# Altium PCB Geiger.PcbDoc
Units mil, origin at the board's own origin, x right, y up, seen from the top; angles counter-clockwise.
Board outline 2005 x 2005 mil, 2 copper layers (Top Layer, Bottom Layer); 26 components, 16 nets, 62 pads, 10 vias.
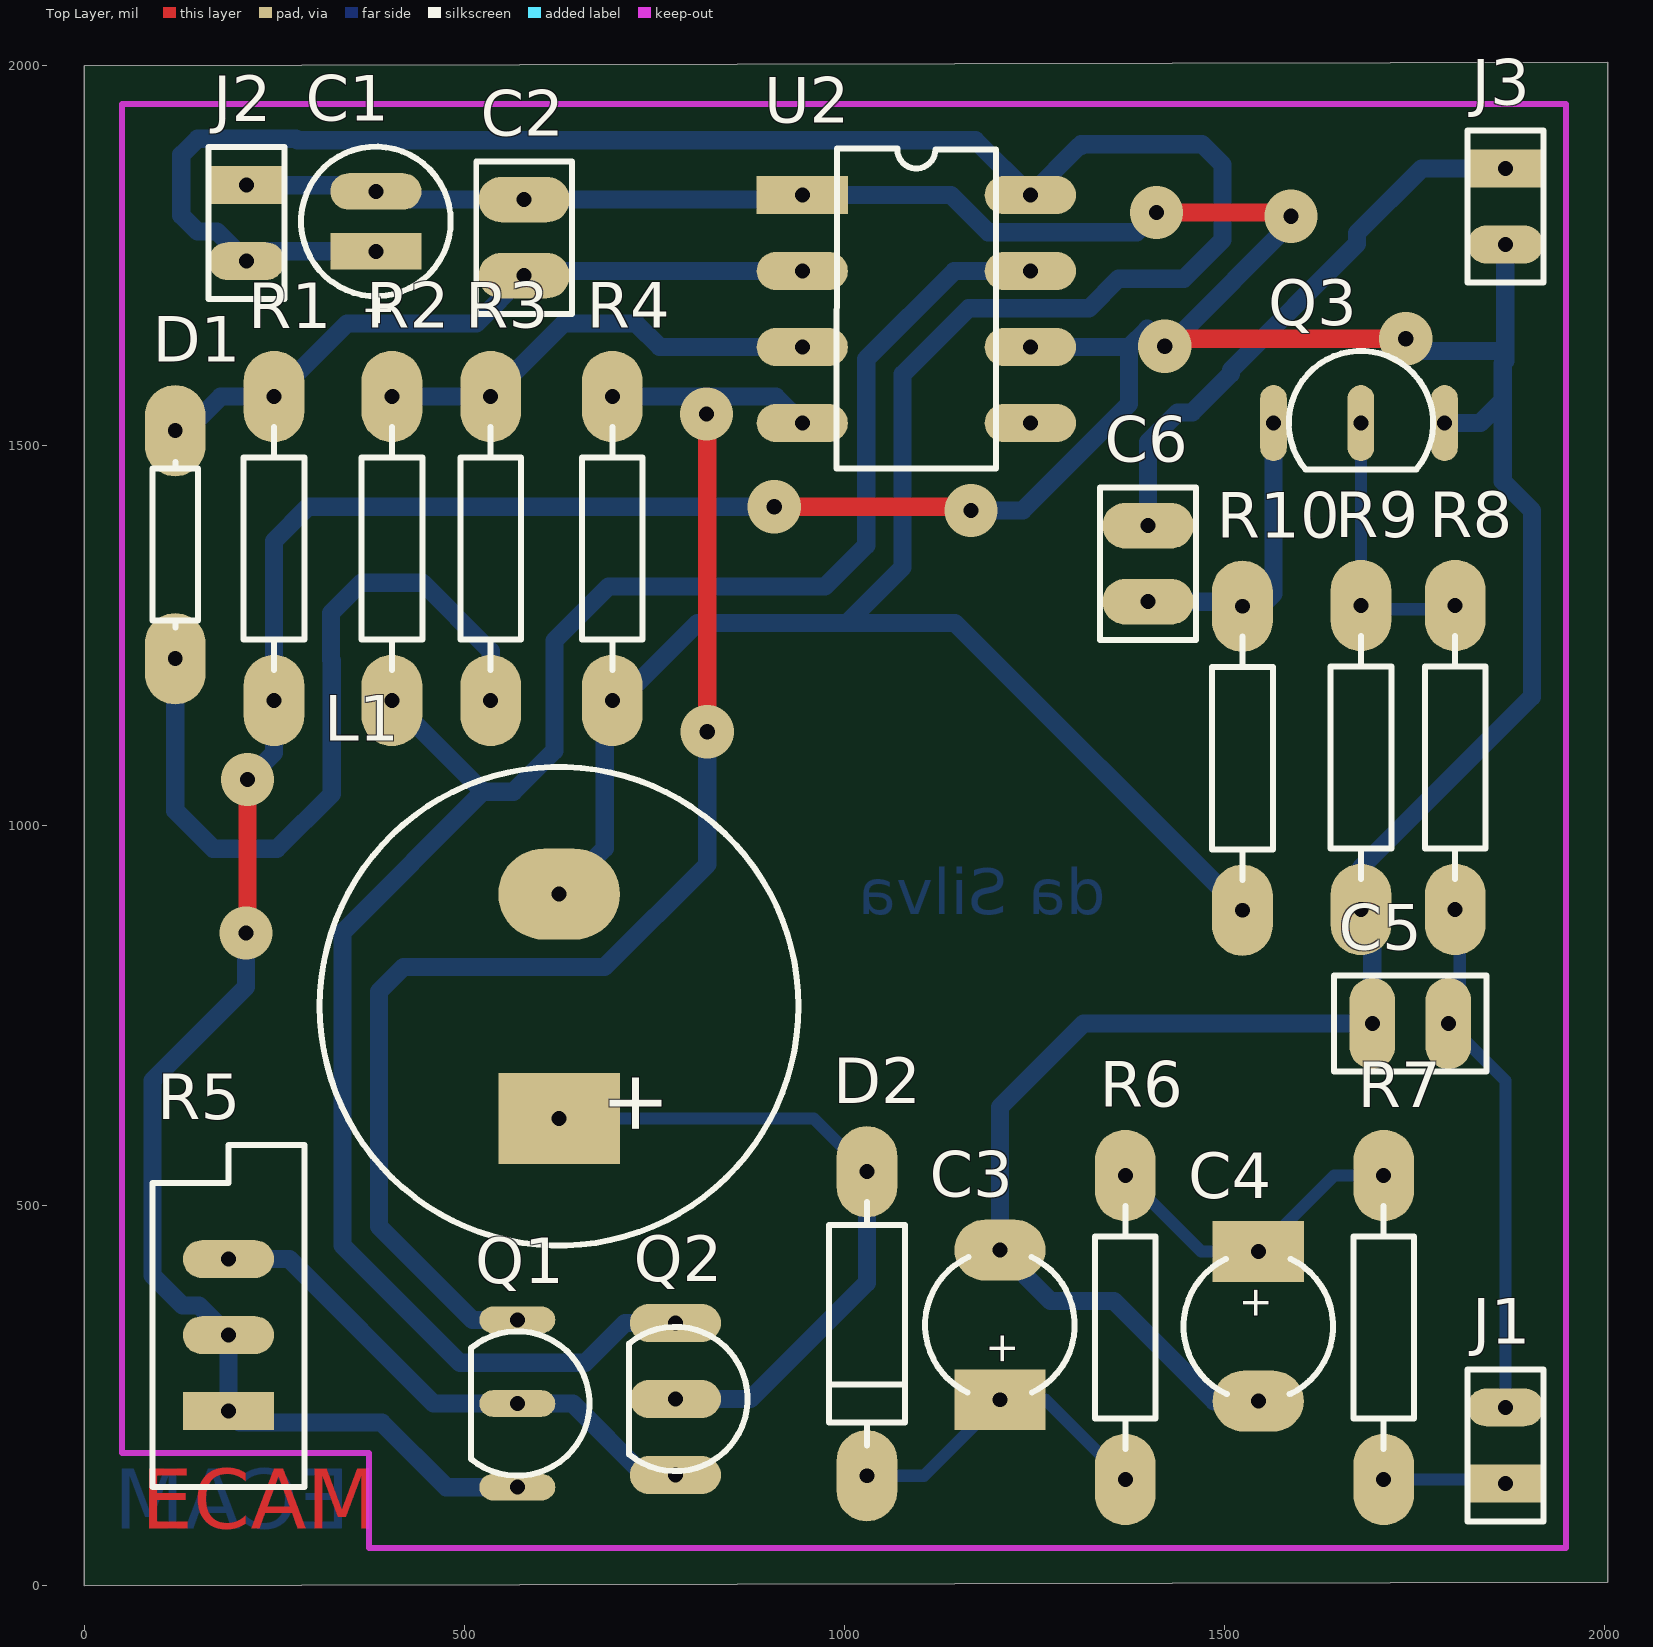
[diagram p0: Top Layer view]
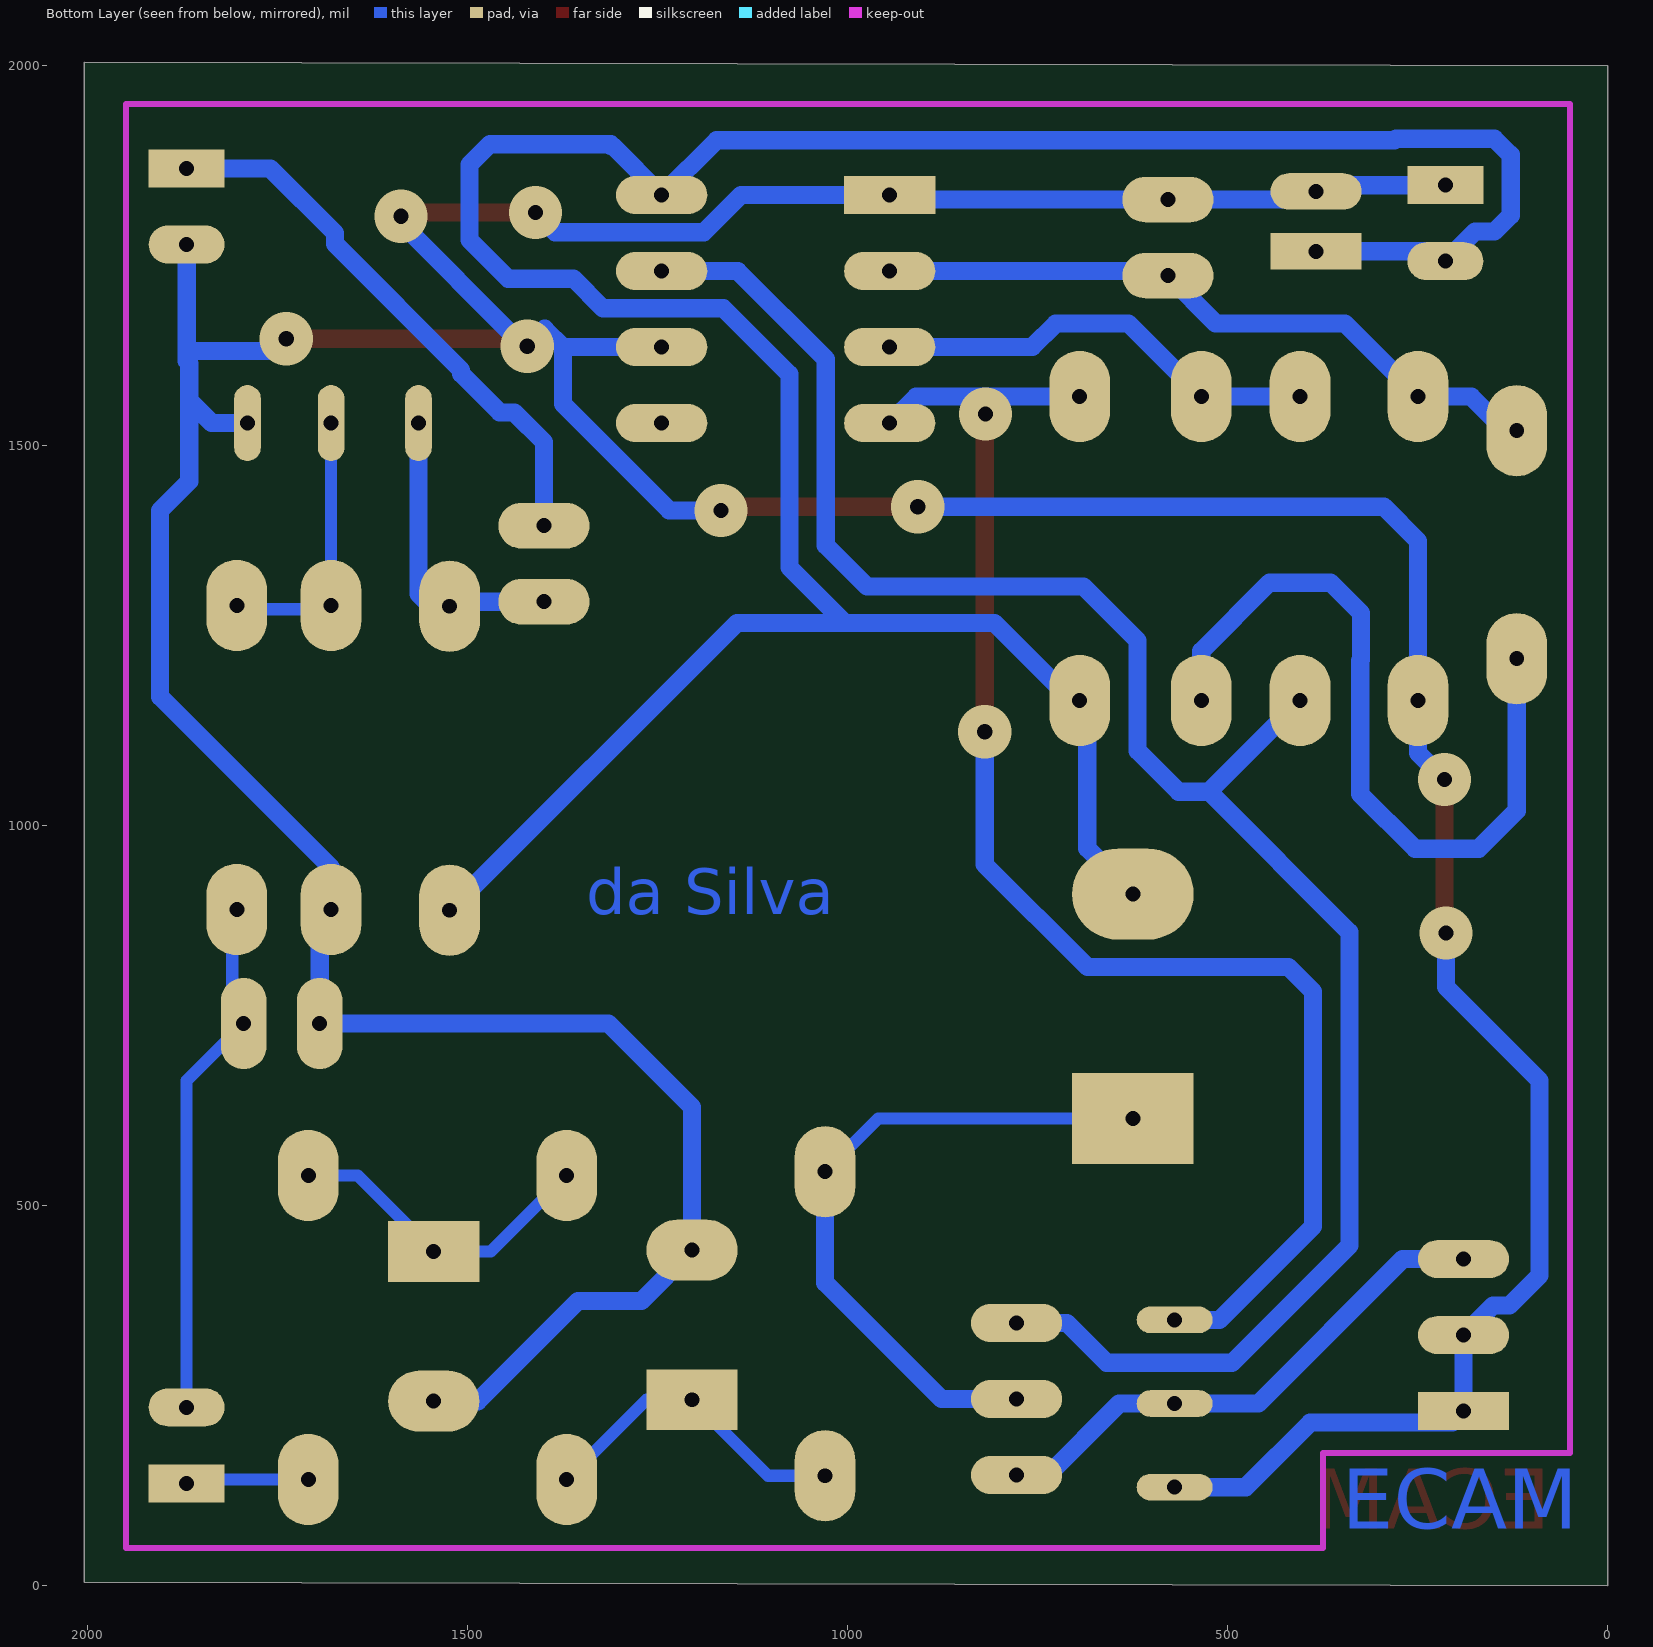
[diagram p1: Bottom Layer view, seen from below]

## Layer stack, top to bottom
Top Layer: signal copper 1.4
Dielectric: core 12.6, FR-4, Dk 4.8
Bottom Layer: signal copper 1.4

## Board outline
0,0 0,2000 2005,2005 2005,5

## Design rules (kind name [scope] priority, off if disabled: settings)
Clearance "Clearance T DIP" [(IsTrack) vs (IsPad AND( HasFootprint('DIP*')))] p1: gap=12
Clearance "Clearance PT" [(isTrack) vs (isPad)] p2: gap=24
Clearance "Clearance TT" [(isTrack) vs (isTrack)] p3: gap=24
Clearance "Clearance PP" [(IsPad) vs (IsPad)] p4: gap=24
Clearance [All] p5: gap=40
FabricationTestPointUsage TestPointUsage [All] p1: valid=0 allowmultiple=FALSE
FabricationTestpoint Testpoint [All] p1: side=3 testpointundercomponent=TRUE minsize=40 maxsize=100 preferedsize=60 minholesize=0 maxholesize=40 preferedholesize=32 testpointgrid=1 allowsidetop=TRUE allowsidebottom=TRUE usegrid=TRUE gridtolerance=0.01
HoleSize [All] p1: absolutevalues=TRUE maxlimit=21.65 minlimit=17.72 maxpercent=80.000 minpercent=20.000
PolygonConnect [All] p1: connectstyle=Relief reliefconductorwidth=10 reliefentries=4 polygonreliefangle="90 Angle" airgapwidth=10
RoutingCorners [All] p1: cornerstyle=45-Degree minsetback=100 maxsetback=1000
RoutingLayers [All] p1: top layer_v5=FALSE bottom layer_v5=TRUE
RoutingVias "ECAM Vias" [All] p1: holewidth=19.68 width=80 viastyle="Through Hole" minholewidth=17.72 minwidth=60 maxholewidth=21.65 maxwidth=120
SolderMaskExpansion [All] p1: expansion=4
Width Width_GND [InNet('GND')] p1: maxlimit=1000 minlimit=24 preferedwidth=40
Width Width_VCC [InNet('VCC')] p2: maxlimit=1000 minlimit=24 preferedwidth=40
Width [All] p3: maxlimit=1000 minlimit=16 preferedwidth=24
23 further rules are at their usual default settings.

## Components (designator, comment, footprint, x,y, rotation, side; value= is the part's Value field where it differs from the comment)
C1 "Cond pol axial" CAPPR2-5x6.8 384,1756 r90 top
C2 "Condensateur" CAPR2.54-5.1x3.2 579,1824 r270 top
C3 "Condensateur" CAPPR5-5x5 1205,245 r90 top
C4 "Condensateur" CAPPR5-5x5 1545,440 r270 top
C5 "Condensateur" CAPR2.54-5.1x3.2 1795,740 r180 top
C6 "Condensateur" CAPR2.54-5.1x3.2 1400,1295 r90 top
D1 "Diode" AXIAL-0.3 120,1220 r90 top
D2 "Diode" DIODE-0.4 1030,545 r270 top
J1 "Connecteur 2" HDR1X2 1870,135 r90 top
J2 "Connecteur 2" HDR1X2 214,1843 r270 top
J3 "Connecteur 2" HDR1X2 1870,1865 r270 top
L1 "Inductance" CAPPR7.5-16x35 625,615 r90 top
Q1 "NPN" TO-92#1 570,190 r180 top
Q2 "NPN" "TO-92 - Bis" 778,146 r180 top
Q3 "NPN" TO-92#2 1730,1530 r270 top
R1 "Résistance" AXIAL-0.4 250,1165 r90 top
R2 "Résistance" AXIAL-0.4 405,1165 r90 top
R3 "Résistance" AXIAL-0.4 535,1165 r90 top
R4 "Résistance" AXIAL-0.4 695,1165 r90 top
R5 "Potentiomètre" VR5 190,230 r90 top
R6 "Résistance" AXIAL-0.4 1370,140 r90 top
R7 "Résistance" AXIAL-0.4 1710,540 r270 top
R8 "Résistance" AXIAL-0.4 1804,1290 r270 top
R9 "Résistance" AXIAL-0.4 1680,890 r90 top
R10 "Résistance" AXIAL-0.4 1524,1289 r270 top
U2 "TLC555CP" DIP8 945,1830 r270 top

## Footprints (in the part's own frame and the unit in brackets; to place one, negate y for a bottom-side part, rotate by r counter-clockwise, add the part's x,y. Pads: shape width x height; smd on the part's side, far side on the other; paste and mask are expansions set on the pad)
AXIAL-0.3 [mil] "Resistor; 2 Leads"
  oval 120x80 hole 19.68 paste+0 mask+0: 1(0,0) 2(300,0)
  silkscreen extent 41,-30 259,30
AXIAL-0.4 [mil] "Resistor; 2 Leads"
  oval 120x80 hole 19.68 paste+0 mask+0: 1(0,0) 2(400,0)
  silkscreen extent 40,-40 360,40
CAPPR2-5x6.8 [mil] "Capacitor, Electrolytic, Radial; Body 5 x 6.8 mm (Dia.xH typ); Pin Spacing 2 mm (typ)"
  rect 48x120 hole 19.68 paste+0 mask+0: 1(0,0)
  oval 48x120 hole 19.68 paste+0 mask+0: 2(78.74,0)
  silkscreen extent -59,-98 138,98
CAPPR5-5x5 [mil] "Capacitor, Electrolytic, Radial; Body 5 x 5 mm (Dia.xH typ); Pin Spacing 5 mm (typ)"
  rect 80x120 hole 19.68 paste+0 mask+0: 1(0,0)
  oval 80x120 hole 19.68 paste+0 mask+0: 2(196.85,0)
  silkscreen extent 10,-98 188,98
CAPPR7.5-16x35 [mil] "Capacitor, Electrolytic, Radial; Body 16 x 35 mm (Dia.xH typ); Pin Spacing 7.5 mm (typ)"
  rect 120x160 hole 19.68 paste+0 mask+0: 1(0,0)
  oval 120x160 hole 19.68 paste+0 mask+0: 2(295.28,0)
  silkscreen extent -167,-315 462,315
CAPR2.54-5.1x3.2 [mil] "Capacitor, Ceramic, Thru-Hole, Dipped Radial; Body 5.1 x 3.2 mm (WxT) Pin Spacing 2.54 mm (typ)"
  oval 60x120 hole 19.68 paste+0 mask+0: 1(0,0) 2(100,0)
  silkscreen extent -50,-63 150,63
DIODE-0.4 [mil] "Tunnel Diode - Dependent Source Model; 2 Leads"
  oval 120x80 hole 19.68 paste+0 mask+0: 1(0,0) 2(400,0)
  silkscreen extent 40,-50 360,50
DIP8 [mil] "DIP; 8 Leads; Row Spacing 7.62 mm; Pitch 2.54 mm"
  rect 50x120 hole 19.68 paste+0 mask+0: 1(0,0)
  oval 50x120 hole 19.68 paste+0 mask+0: 2(100,0) 3(200,0) 4(300,0) 5(300,300) 6(200,300) 7(100,300) 8(0,300)
  silkscreen extent -62,45 360,255
HDR1X2 [mm] "Connector; Header; 2 Position"
  rect 1.27x2.54 hole 0.5 paste+0 mask+0: 1(0,0)
  oval 1.27x2.54 hole 0.5 paste+0 mask+0: 2(2.54,0)
  silkscreen extent -1.27,-1.27 3.81,1.27
TO-92#1 [mil] "TO, Flat Index; 3 In-Line, Axial Leads; Body Dia. 4.6mm; Leads 0.48 x 0.43 mm (max) NOT ECAM RULES"
  oval 100x35 hole 19.68 paste+0 mask+0: 1(0,60) 2(0,-50) 3(0,-160)
  silkscreen extent -95,-145 61,45
TO-92#2 [mil] "TO, Flat Index; 3 In-Line, Axial Leads; Body Dia. 4.6mm; Leads 0.48 x 0.43 mm (max) NOT ECAM RULES"
  oval 100x35 hole 19.68 paste+0 mask+0: 1(0,60) 2(0,-50) 3(0,-165)
  silkscreen extent -95,-145 61,45
"TO-92 - Bis" [mil] "TO, Flat Index; 3 In-Line, Axial Leads; Body Dia. 4.6mm; Leads 0.48 x 0.43 mm (max)"
  oval 120x50 hole 19.68 paste+0 mask+0: 1(0,0) 2(0,-100) 3(0,-200)
  silkscreen extent -95,-195 61,-5
VR5 [mil] "Potentiometer; 3 Leads"
  rect 50x120 hole 19.68 paste+0 mask+0: 1(0,0)
  oval 50x120 hole 19.68 paste+0 mask+0: 2(200,0) 3(100,0)
  silkscreen extent -100,-100 350,100

## Part data
C1: "Condensateur polarisé"
J1 J2 J3: "Connecteur"
Q1 Q2 Q3: "Transistor Bipolaire"
R1 R2 R3 R4 R6 R7 R8 R9 R10: "Résistance standard"
U2: library part LM555CN, "Timer, 8-pin MDIP"

## Via types
v1: diameter 70, hole 20, Top Layer to Bottom Layer, 10 vias

## Nets (pads, with @x,y where several pads share a name; then routed paths per layer and width w, separated by ;. In a path a pad name is that pad's centre, name@x,y a point inside that pad or via, vN(x,y) a via of type N, cw(c..) or ccw(c..) an arc to the next point about the centre after c; other vN are vias at no path point)
GND: C1.2 C2.1 C3.2 C4.2 C5.2 J2.1 J3.2 Q1.1 Q3.1 R1.1 R5.1 R5.3 R9.1 U2.1 U2.6 | length 7626.7
  Top Layer w24: v1@215,859 v1@215,1064 ; v1(908,1420) v1@1155,1420 ; v1(1411,1807) v1@1584,1807 ; v1@1423,1641 v1(1739,1641) ; v1@1737,1628 v1@1760,1651
  Bottom Layer w24: v1(213,859) 213,788 90,665 90,408.73 129.73,369 151,369 R5.3 R5.1 205,215 391.57,215 476.57,130 Q1.1 ; J2.1 375.74,1843 C1.2 394.74,1824 C2.1 939,1824 U2.1 1140.7,1830 1189.7,1781 1385,1781 ; v1(215,1061) 250,1096 R1.1 250,1375 295,1420 v1(908,1420) ; v1@1145,1415 1235,1415 1375,1555 1375,1630 ; U2.6 1375,1630 ; v1@1399,1654 1375,1630 ; v1(1422,1631) 1425.92,1631 v1@1599.92,1805 ; C4.2 1486.85,243.15 1355,375 1271.85,375 C3.2 1205,630 1315,740 C5.2 1695,875 R9.1 1680,945 1905,1170 1905,1415 1866.5,1453.5 1866.5,1559.5 ; v1(1739,1641) 1755,1625 1870,1625 ; Q3.1 1837,1530 1866.5,1559.5 ; J3.2 1870,1625 ; 1866.5,1559.5 1866.5,1608.5 1870,1612 1870,1625
  other v1: 1167,1415 1588,1802
NetC2_2: C2.2 D1.2 R1.2 U2.2 | length 904.1
  Bottom Layer w24: D1.2@130,1515 180,1565 R1.2 346,1661 516,1661 C2.2 585,1730 U2.2
NetC3_1: C3.1 D2.2 R6.1 | length 424.9
  Bottom Layer w16: D2.2 1105,145 C3.1 1265,245 R6.1
NetC4_1: C4.1 R6.2 R7.1 | length 422.8
  Bottom Layer w16: R6.2 1470,440 C4.1 1645,540 R7.1
NetC5_1: C5.1 J1.2 R8.2 | length 687.3
  Bottom Layer w16: R8.2@1810,885 1810,755 C5.1 1870,665 J1.2
NetC6_1: C6.1 Q3.3 R10.1 | length 398.3
  Bottom Layer w24: C6.1 1545,1295 1550,1290 1565,1305 Q3.3
NetC6_2: C6.2 J3.1 | length 740.3
  Bottom Layer w24: C6.2 1400,1505 1439,1544 1458.04,1544 1509,1594.96 1509,1599.96 1675,1765.96 1675,1780 1760,1865 J3.1
NetD1_1: D1.1 R3.1 | length 1023.7
  Bottom Layer w24: D1.1 120,1020 170,970 253.89,970 326,1042.11 326,1217.48 325,1218.48 325,1280 365,1320 445,1320 535,1230 R3.1
NetD2_1: D2.1 L1.1 Q2.2 | length 895.4
  Bottom Layer w16: L1.1 960,615 D2.1
  Bottom Layer w24: Q2.2 877,246 1030,399 D2.1
NetJ1_1: J1.1 R7.2 | length 162.1
  Bottom Layer w16: R7.2 1865,140 J1.1
NetQ1_2: Q1.2 Q2.1 R5.2 | length 705.6
  Bottom Layer w24: R5.2 270,430 460,240 Q1.2 643,240 737,146 Q2.1
NetQ1_3: Q1.3 R4.2 U2.4 | length 1901.3
  Top Layer w24: v1(820,1124) v1@820,1533
  Bottom Layer w24: Q1.3 511,350 388,473 388,782 420.28,814.28 684.76,814.28 820,949.51 v1(820,1124) ; R4.2@685,1565 910,1565 U2.4
  other v1: 819,1542
NetQ2_2: Q2.3 R2.1 U2.7 | length 2599.3
  Bottom Layer w24: R2.1 525,1045 ; Q2.3 711.88,346 659.38,293.5 494.5,293.5 340,448 340,860 525,1045 ; U2.7 1145,1730 1029,1614 1029,1369 975,1315 690,1315 619,1244 619,1099 565,1045 525,1045
NetQ3_2: Q3.2 R8.1 R9.2 | length 372.1
  Bottom Layer w16: Q3.2 R9.2 1685,1285 R8.1@1810,1285
NetR2_2: R2.2 R3.2 U2.3 | length 592.6
  Bottom Layer w24: R2.2 R3.2 631,1661 726.48,1661 757.48,1630 U2.3
VCC: C1.1 J2.2 L1.2 R4.1 R10.2 U2.8 | length 4071.6
  Bottom Layer w24: C1.1 227,1756 J2.2 175,1782 149.09,1782 128,1803.09 128,1882.91 149.09,1904 278.91,1904 280.91,1902 1173,1902 U2.8 1310,1895 1312,1895 ; L1.2 685,970.28 R4.1@685,1165 ; R4.1 705,1165 807,1267 1004,1267 ; 1312,1897 1471,1897 1498,1870 1498,1770.96 1447.04,1720 1361.11,1720 1322.11,1681 1163.88,1681 1077,1594.12 1077,1340 1004,1267 ; R10.2 1146,1267 1004,1267
pads on no net: U2.5

## Keep-outs
Keep-Out Layer:
  lines w8: 50,175 50,1950 1950,1950 1950,50 375,50 375,175 50,175

## Other copper
Top Layer:
  text "ECAM" at 75,75 h78.74
  text ".GTL" at 5864,-2603 h90
Bottom Layer:
  text "da Silva" at 1344,884 h60
  text "ECAM" at 350,75 h78.74
  text ".GBL" at 5864,-2603 h90
Multi-Layer:

## Silkscreen, mask and mechanical layers (free items; w line width, h text height)
Top Overlay:
  text ".GTO" at 5864,-2603 h90
Top Paste:
  text ".GTP" at 5864,-2603 h90
Bottom Paste:
  text ".GBP" at 5864,-2603 h90
Top Solder:
  text ".GTS" at 5864,-2603 h90
Bottom Solder:
  text ".GBS" at 5864,-2603 h90
Mechanical 1:
  lines w7.87: 0,0 2000,0 2000,2000 0,2000 0,0
Mechanical 16:
  circle w3.94: c4770,-2590 r55.12
  lines w5: -4075,-1300 -3875,-1300 ; -4075,600 -3875,600 ; -4075,2500 -3875,2500 ; -1595,-3200 -1595,-3000 ; -1595,4200 -1595,4400 ; 1280,-3200 1280,-3000 ; 1280,4200 1280,4400 ; 1915,-2700 6415,-2700 ; 1915,-2400 6415,-2400 ; 1915,-2100 3415,-2100 ; 3415,-3000 3415,-2400 3415,-1800 ; 4140,835 4340,835 ; 4155,-3200 4155,-3000 ; 4155,4200 4155,4400 ; 5515,-3000 5515,-2400 ; 6415,-1310 6615,-1310 ; 6415,2490 6615,2490 ; 1915,-3000 1915,-1800 ; 1915,-3000 6415,-3000 ; 1915,-3000 515,-3000 515,-1800 1915,-1800 ; 1915,-1800 3415,-1800 ; 3415,-1800 6415,-1800 6415,-3000 ; 6415,-3000 -3875,-3000 -3875,4200 6415,4200 6415,-3000 ; -4075,-3200 6615,-3200 6615,4400 -4075,4400 -4075,-3200
  text "1" at -3043,4265 h70
  text "2" at -183,4265 h70
  text "3" at 2697,4265 h70
  text "4" at 5567,4265 h70
  text "A" at -4000,3359 h70
  text "A" at 6490,3349 h70
  text "B" at -4000,1467 h70
  text "B" at 6490,1457 h70
  text "C" at -4000,-443 h70
  text "C" at 6490,-453 h70
  text "1" at -1668,-1860 h70
  text "Concepteur du circuit :" at 1965,-1900 h45
  text "TITRE :" at 3465,-1900 h45
  text "Generateur de nombres aleatoires" at 3725,-2170 h100
  text "Concepteur du PCB :" at 1965,-2195 h45
  text "ECAM" at 750,-2210 h240
  text "D" at -4000,-2333 h70
  text "D" at 6490,-2343 h70
  text "Prom. de l'Alma 50" at 820,-2480 h60
  text "Date :" at 1965,-2500 h45
  text "PART NO.:" at 3465,-2500 h45
  text "Layer :" at 5565,-2500 h45
  text ".Print_Date" at 2355,-2535 h70
  text "1" at 3470,-2620 h60
  text "C" at 4745,-2620 h60
  text "ECAM" at 4826,-2635 h100
  text ".Print_Time" at 2360,-2665 h70
  text "1200 Bruxelles" at 820,-2700 h60
  text "Nom du fichier :" at 1965,-2800 h45
  text "DWG NO:" at 3465,-2800 h45
  text ".Print_Scale" at 5725,-2880 h40
  text ".Printout_Name" at 3615,-2915 h60
  text ".Pcb_File_Name_No_Path" at 2015,-2920 h70
  text "2" at -183,-3135 h70
  text "3" at 2697,-3135 h70
  text "4" at 5567,-3135 h70

## Text inside footprints (layer, text, board x,y; h text height)
C1: Top Overlay "+" at 404,1655.37 h39.37 r90
C3: Top Overlay "+" at 1225,290 h39.37 r90
C4: Top Overlay "+" at 1525,395 h39.37 r270
L1: Top Overlay "+" at 760,590 h78.74 r90